# Altium PCB PCB_linear power supply_2023-05-23.pcbdoc
Units mil, origin at the board's own origin, x right, y up, seen from the top; angles counter-clockwise.
Board outline 2826.61 x 2235 mil, 2 copper layers (Top Layer, Bottom Layer); 11 components, 9 nets, 30 pads, 0 vias.
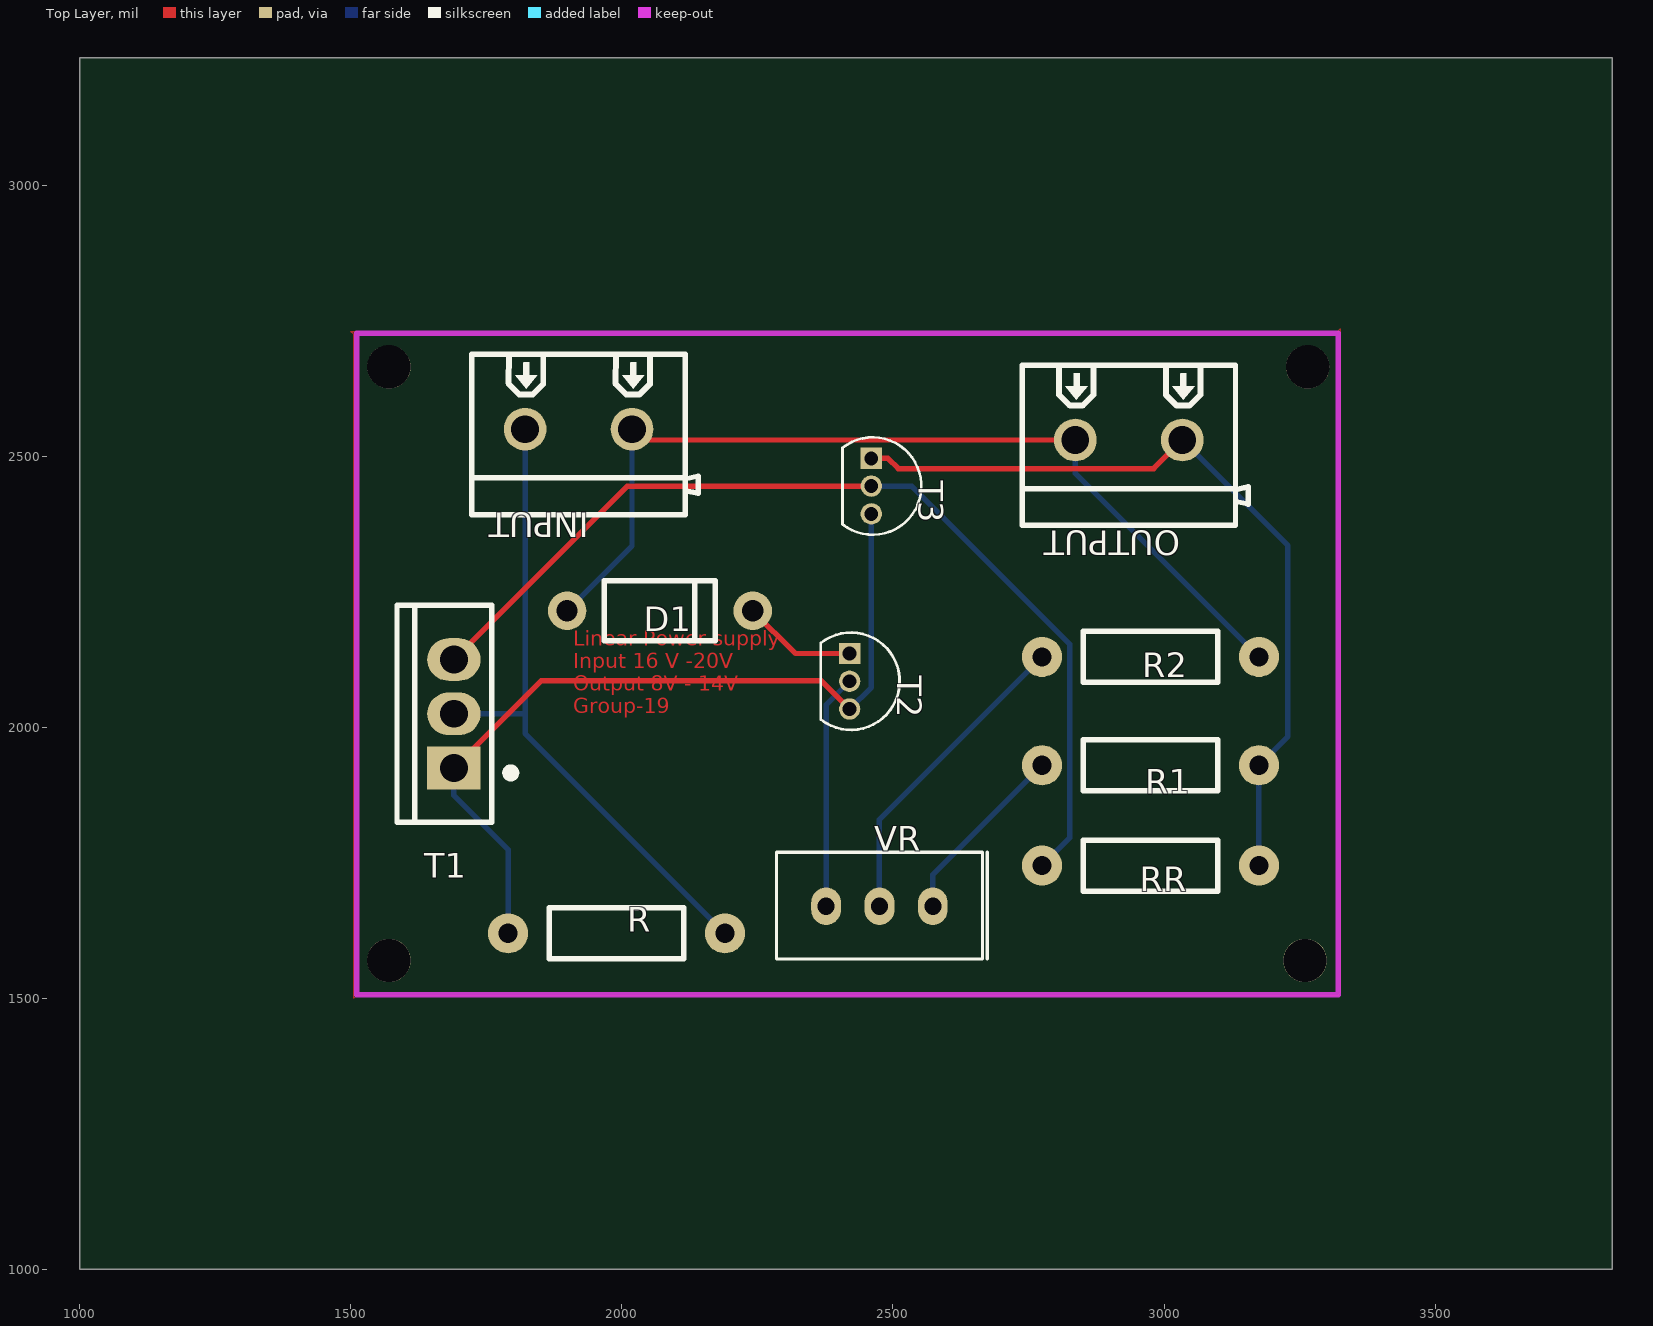
[diagram p0: Top Layer view]
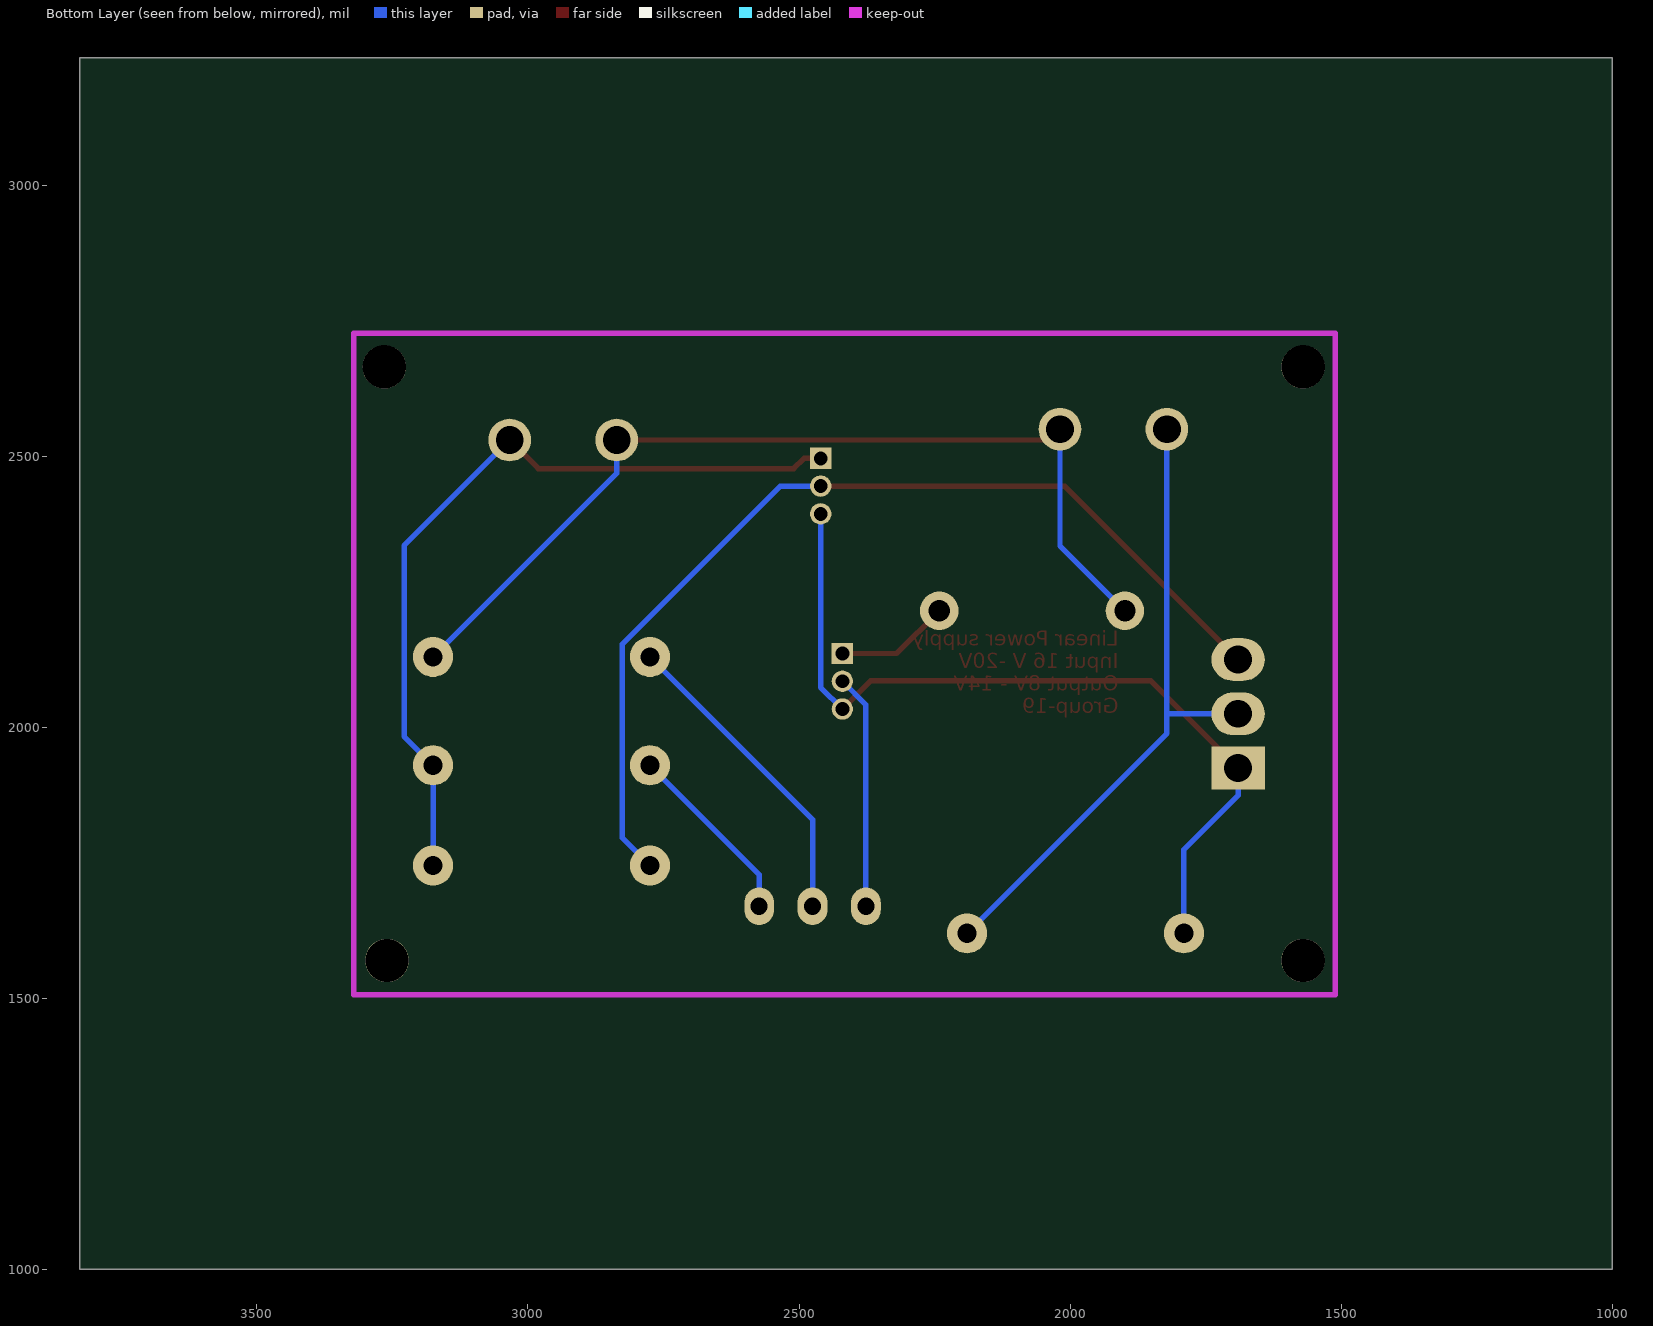
[diagram p1: Bottom Layer view, seen from below]

## Layer stack, top to bottom
Top Layer: signal copper (thickness not stored)
Dielectric: dielectric 12.6, FR-4, Dk 4.8
Bottom Layer: signal copper (thickness not stored)

## Board outline
3826.61,1000 1000,1000 1000,3235 3826.61,3235

## Components (designator, comment, footprint, x,y, rotation, side; value= is the part's Value field where it differs from the comment)
D1 "BZV85-C4V7,113" DO-41_BD2.4-L4.7-P8.70-D0.9-RD 2070,2215 r180 top
INPUT "WJ301V-5.0-2P" CONN-TH_2P-P5.00_WJ301V-5.00-2P 1920,2550 r180 top
OUTPUT "WJ301V-5.0-2P" CONN-TH_2P-P5.00_WJ301V-5.00-2P 2935,2530 r180 top
R "1k" R_AXIAL-0.4 1990,1620 r180 top
R1 "1k" R_AXIAL-0.4 2975,1930 r180 top
R2 "1k" R_AXIAL-0.4 2975,2130 r0 top
RR "1k" R_AXIAL-0.4 2975,1745 r0 top
T1 "TIP31C" TO-220-3_L10.0-W4.5-P2.54-T 1690,2025 r180 top
T2 "BC109" TO-92-3_L4.6-W3.6-P1.30-L_2N3904 2420,2085 r270 top
T3 "BC109" TO-92-3_L4.6-W3.6-P1.30-L_2N3904 2460,2445 r270 top
VR "10k" RES-ADJ-TH_3296W-L 2475,1670 r180 top

## Footprints (in the part's own frame and the unit in brackets; to place one, negate y for a bottom-side part, rotate by r counter-clockwise, add the part's x,y. Pads: shape width x height; smd on the part's side, far side on the other; paste and mask are expansions set on the pad)
CONN-TH_2P-P5.00_WJ301V-5.00-2P [mm]
  round 2 hole 1.3: 1(-2.504,0) 2(2.504,0)
  silkscreen extent -5.6,-3.63 5,4
DO-41_BD2.4-L4.7-P8.70-D0.9-RD [mm]
  round 1.8 hole 1: 1(-4.35,0) 2(4.35,0)
  silkscreen extent -2.6,-1.4 2.6,1.4
R_AXIAL-0.4 [mil]
  round 74 hole 35.4: 1(-200,0) 2(200,0)
  silkscreen extent -124,-47 124,47
RES-ADJ-TH_3296W-L [mm]
  oval 1.4x1.75 hole 0.8: 1(-2.5,0) 2(0,0) 3(2.5,0)
  silkscreen extent -5.05,-2.53 4.83,2.48
TO-92-3_L4.6-W3.6-P1.30-L_2N3904 [mm]
  rect 1x1 hole 0.65: 1(-1.3,0)
  round 1 hole 0.65: 2(0,0) 3(1.3,0)
  silkscreen extent -2.28,-1.35 2.28,2.34
TO-220-3_L10.0-W4.5-P2.54-T [mm]
  rect 2.5x2 hole 1.3: 1(0,2.54)
  oval 2.5x2 hole 1.3: 2(0,0) 3(0,-2.54)
  silkscreen extent -2.86,-5.08 2.67,5.08

## Free pads (board coordinates)
  round 80 hole 80 unplated: ""(1570,1570) ""(1570,2665) ""(3260,1570) ""(3265,2665)

## Nets (pads, with @x,y where several pads share a name; then routed paths per layer and width w, separated by ;. In a path a pad name is that pad's centre, name@x,y a point inside that pad or via, vN(x,y) a via of type N, cw(c..) or ccw(c..) an arc to the next point about the centre after c; other vN are vias at no path point)
GND: D1.2 INPUT.1 OUTPUT.2 R2.2 | length 1751
  Top Layer w10: INPUT.1 2038.6,2530 OUTPUT.2
  Bottom Layer w10: D1.2 2018.6,2334.86 INPUT.1 ; OUTPUT.2 2836.4,2468.6 R2.2
R1_2: R1.2 VR.1 | length 343.5
  Bottom Layer w10: VR.1 2573.42,1728.42 R1.2
R2_1: R2.1 VR.2 | length 584.3
  Bottom Layer w10: VR.2 2475,1830 R2.1
R_1: INPUT.2 R.1 T1.2 | length 1214.1
  Bottom Layer w10: T1.2 1821.4,2025 ; INPUT.2 1821.4,2025 ; R.1 1821.4,1988.6 1821.4,2025
R_2: R.2 T1.1 T2.3 T3.3 | length 1541.2
  Top Layer w10: T1.1 1850.87,2085.87 2367.95,2085.87 T2.3
  Bottom Layer w10: T1.1 1690,1874.59 1790,1774.59 R.2 ; T2.3 2460,2073.82 T3.3
RR_1: RR.1 T1.3 T3.2 | length 1819.1
  Top Layer w10: T1.3 2010,2445 T3.2
  Bottom Layer w10: T3.2 2534.27,2445 2826.35,2152.92 2826.35,1796.35 RR.1
RR_2: OUTPUT.1 R1.1 RR.2 T3.1 | length 1491.2
  Top Layer w10: T3.1 2490.69,2496.18 2509.75,2477.12 2980.72,2477.12 OUTPUT.1
  Bottom Layer w10: OUTPUT.1 3228.45,2335.15 3228.45,1983.45 R1.1 RR.2
T2_1: D1.1 T2.1 | length 211.4
  Top Layer w10: D1.1 2320.08,2136.18 T2.1
T2_2: T2.2 VR.3 | length 433
  Bottom Layer w10: VR.3 2376.57,2041.57 T2.2

## Polygon pours and split planes (outlines as drawn)
GND on Top Layer (solid): 1500,2730 3320,2730 3325,2735 3325,1510 3320,1505 1510,1505 1505,1500 1505,2725 1500,2730 1515,2730

## Other copper
Top Layer:
  text "Linear Power supply / Input 16 V -20V / Output 8V - 14V / Group-19" at 1910,2026.22 h27.56